# EAGLE board pcb - vcf et etage sortie v2 (EAGLE 9.5.1)
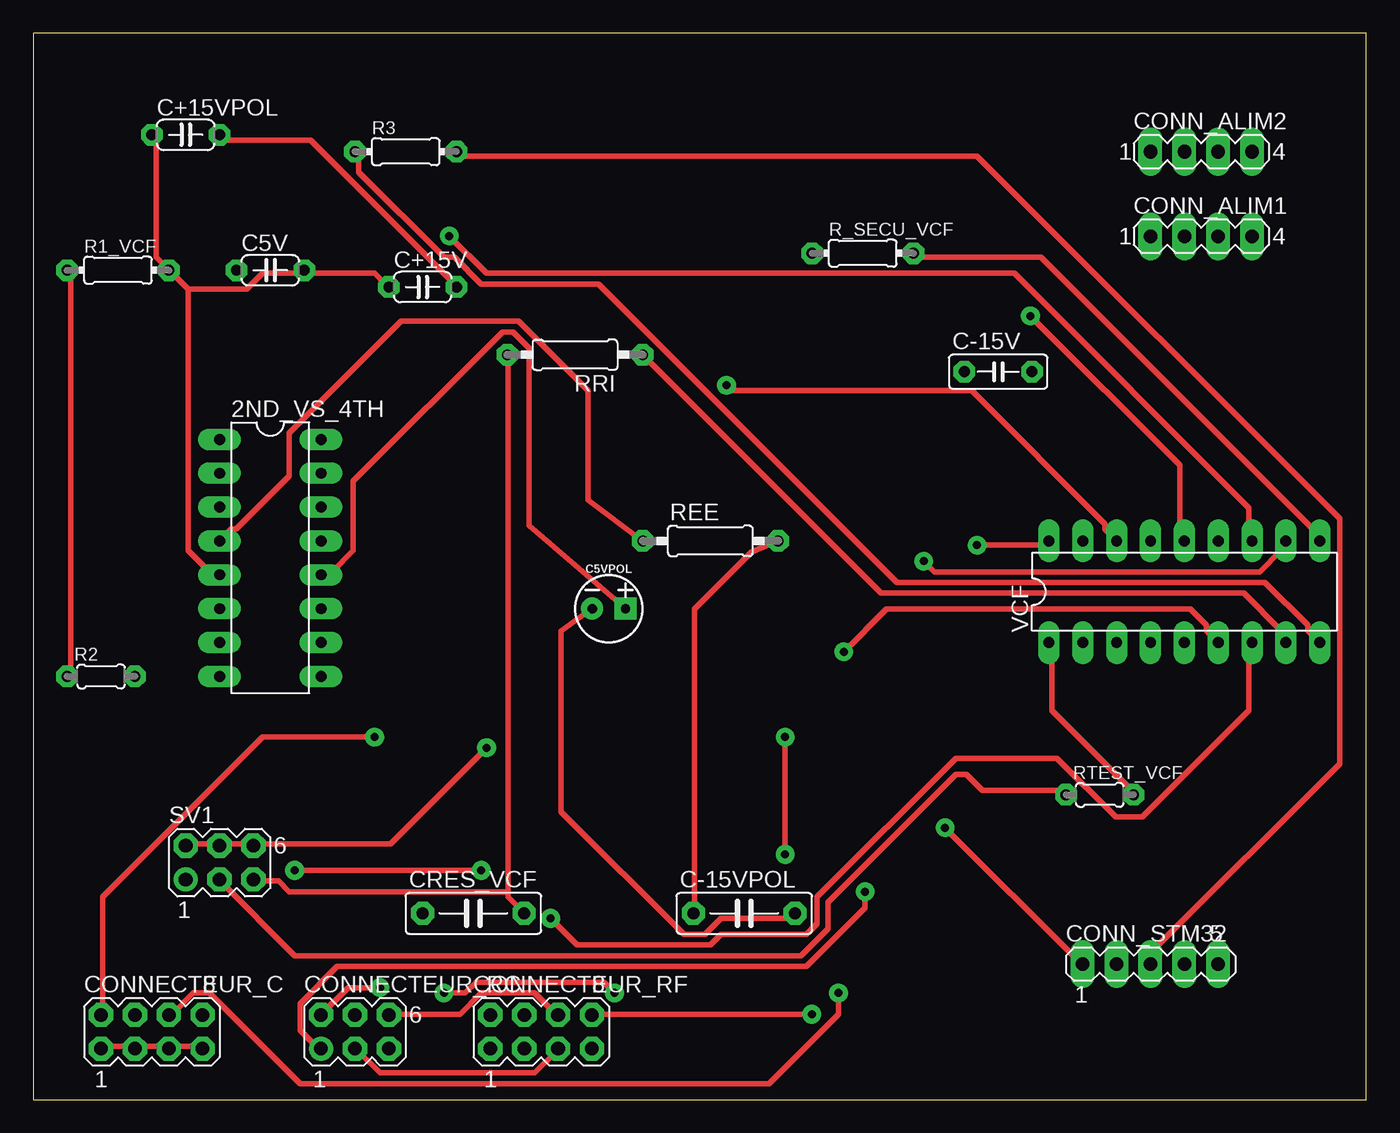
[diagram p0: board, top side]
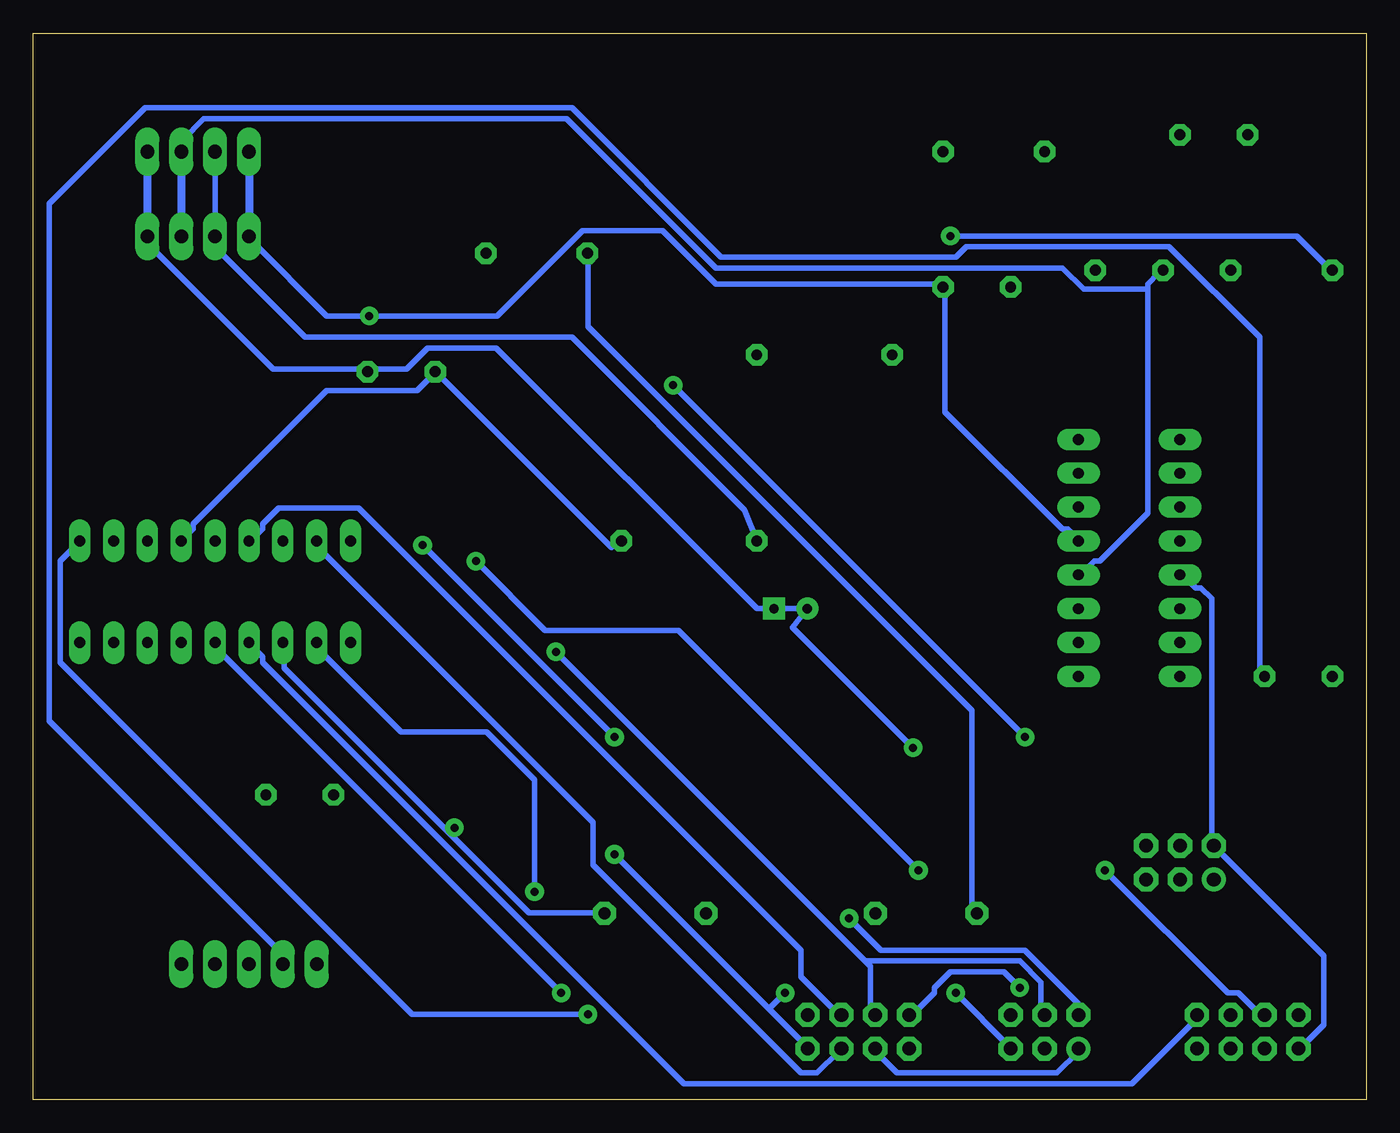
[diagram p1: board, bottom side, seen from below]

Size 100 x 80 mm. Coordinates in mm from the lower left corner, seen from the top.
Outline: 0,0 100,0 100,80 0,80 0,0
Copper layers (1*16): Top 0.035mm / dielectric 1.5mm / Bottom 0.035mm
Design rules "ENSEA_2019": minimum track width 0.4mm, minimum drill 0.6mm, track to track 0.4mm, track to pad 0.4mm, pad to pad 0.4mm, via to via 0.4mm, smd to smd 0.4mm, copper to edge 1mm, drill to drill 0.4mm, minimum pad ring 0.4mm, minimum via ring 0.4mm, stop-mask expansion 4mil, vias tented up to drill 0mil, thermal gap 0.4mm

## Footprints (pad centres in the part's own frame; a part is rotated, then mirrored left to right if it is on the bottom)
DIL16 = drill 0.813 long: 1 -8.89,-3.81; 2 -6.35,-3.81; 3 -3.81,-3.81; 4 -1.27,-3.81; 5 1.27,-3.81; 6 3.81,-3.81; 7 6.35,-3.81; 8 8.89,-3.81; 9 8.89,3.81; 10 6.35,3.81; 11 3.81,3.81; 12 1.27,3.81; 13 -1.27,3.81; 14 -3.81,3.81; 15 -6.35,3.81; 16 -8.89,3.81
C050-024X044 = drill 0.813 octagon: 1 -2.54,0; 2 2.54,0
CPOL-RADIAL-2.5MM-5MM-KIT = drill 0.7 pad 1.651 square: 1 1.25,0 | drill 0.7 pad 1.651: 2 -1.25,0
C050-025X075 = drill 0.813 octagon: 1 -2.54,0; 2 2.54,0
C075-032X103 = drill 0.914 octagon: 1 -3.81,0; 2 3.81,0
MA04-1 = drill 1.016 long: 1 -3.81,0; 2 -1.27,0; 3 1.27,0; 4 3.81,0
MA05-1 = drill 1.016 long: 1 -5.08,0; 2 -2.54,0; 3 0,0; 4 2.54,0; 5 5.08,0
MA04-2 = drill 1.016 octagon: 1 -3.81,-1.27; 2 -3.81,1.27; 3 -1.27,-1.27; 4 -1.27,1.27; 5 1.27,-1.27; 6 1.27,1.27; 7 3.81,-1.27; 8 3.81,1.27
MA03-2 = drill 1.016: 1 -2.54,-1.27 | drill 1.016 octagon: 2 -2.54,1.27; 3 0,-1.27; 4 0,1.27; 5 2.54,-1.27; 6 2.54,1.27
0204/7 = drill 0.813 octagon: 1 -3.81,0; 2 3.81,0
0204/5 = drill 0.813 octagon: 1 -2.54,0; 2 2.54,0
0207/10 = drill 0.813 octagon: 1 -5.08,0; 2 5.08,0
DIL18 = drill 0.813 long: 1 -10.16,-3.81; 2 -7.62,-3.81; 3 -5.08,-3.81; 4 -2.54,-3.81; 5 0,-3.81; 6 2.54,-3.81; 7 5.08,-3.81; 8 7.62,-3.81; 9 10.16,-3.81; 10 10.16,3.81; 11 7.62,3.81; 12 5.08,3.81; 13 2.54,3.81; 14 0,3.81; 15 -2.54,3.81; 16 -5.08,3.81; 17 -7.62,3.81; 18 -10.16,3.81

## Placement (x,y rotation side)
2ND_VS_4TH  ADG411N  [DIL16]  17.78,40.64 270 top
C5V  100n  [C050-024X044]  17.78,62.23 0 top
C5VPOL  10uF  [CPOL-RADIAL-2.5MM-5MM-KIT]  43.18,36.83 0 top
C+15V  100n  [C050-024X044]  29.21,60.96 0 top
C+15VPOL  1u  [C050-024X044]  11.43,72.39 0 top
C-15V  100n  [C050-025X075]  72.39,54.61 0 top
C-15VPOL  1u  [C075-032X103]  53.34,13.97 0 top
CONN_ALIM1  [MA04-1]  87.63,64.77 0 top
CONN_ALIM2  [MA04-1]  87.63,71.12 0 top
CONN_STM32  [MA05-1]  83.82,10.16 0 top
CONNECTEUR_C  [MA04-2]  8.89,5.08 0 top
CONNECTEUR_RC  [MA03-2]  24.13,5.08 0 top
CONNECTEUR_RF  [MA04-2]  38.1,5.08 0 top
CRES_VCF  1u  [C075-032X103]  33.02,13.97 0 top
R1_VCF  10k  [0204/7]  6.35,62.23 0 top
R2  100k  [0204/5]  5.08,31.75 0 top
R3  100k  [0204/7]  27.94,71.12 0 top
R_SECU_VCF  1k  [0204/7]  62.23,63.5 0 top
REE  1.5k  [0207/10]  50.8,41.91 0 top
RRI  51k  [0207/10]  40.64,55.88 180 top
RTEST_VCF  91k  [0204/5]  80.01,22.86 0 top
SV1  [MA03-2]  13.97,17.78 0 top
VCF  AS3320  [DIL18]  86.36,38.1 0 top

## Library data of the parts
2ND_VS_4TH = analog-devices; MF: ALTERA CORPORATION; MPN: ADG411BN; OC_FARNELL: 1424317; OC_NEWARK: 05F6198
C5V C+15V C+15VPOL C-15V C-15VPOL CRES_VCF = rcl; SPICEPREFIX: C
C5VPOL = SparkFun-Capacitors; PROD_ID: CAP-08440
CONN_ALIM1 CONN_ALIM2 CONN_STM32 CONNECTEUR_C CONNECTEUR_RC CONNECTEUR_RF SV1 = con-lstb; OC_FARNELL: unknown; OC_NEWARK: unknown
R1_VCF R2 R3 R_SECU_VCF REE RRI RTEST_VCF = rcl; SPICEPREFIX: R
VCF = analog-audio-chips

## Nets
5V: 2ND_VS_4TH.12 C5V.1 C5VPOL.1 CONN_ALIM1.3 CONN_ALIM2.3
+15V: 2ND_VS_4TH.13 C+15V.2 C+15VPOL.2 CONN_ALIM1.1 CONN_ALIM2.1 VCF.14
-15V: 2ND_VS_4TH.4 CONN_ALIM1.2 CONN_ALIM2.2 REE.1
AGND: 2ND_VS_4TH.5 C5V.2 C5VPOL.2 C+15V.1 C+15VPOL.1 C-15V.2 C-15VPOL.2 CONN_ALIM1.4 CONN_ALIM2.4 CONN_STM32.1 CONNECTEUR_C.1 CONNECTEUR_C.3 CONNECTEUR_C.5 CONNECTEUR_C.7 R1_VCF.2 SV1.2 SV1.4 SV1.6 VCF.3
CV_CUTOFF: CONN_STM32.2 R2.2
CV_RES: CONN_STM32.3 R3.2
I_IN: SV1.1
IN_2NDORDER: CONN_STM32.4
IN_4THORDER: CONN_STM32.5
N$1: CONNECTEUR_RF.1
N$2: CONNECTEUR_RC.2 CONNECTEUR_RF.2 VCF.7
N$3: CONNECTEUR_C.4 VCF.11
N$4: CONNECTEUR_C.2 VCF.16
N$5: CONNECTEUR_C.8 VCF.4
N$6: CONNECTEUR_C.6 VCF.5
N$7: CONNECTEUR_RC.1 CONNECTEUR_RF.3 VCF.2
N$8: CONNECTEUR_RC.4 CONNECTEUR_RF.4 VCF.6
N$9: CONNECTEUR_RC.3 CONNECTEUR_RF.5 VCF.17
N$10: CONNECTEUR_RC.6 CONNECTEUR_RF.6 VCF.15
N$11: CONNECTEUR_RC.5 CONNECTEUR_RF.7 VCF.18
N$37: R1_VCF.1 R2.1 VCF.12
N$58: CRES_VCF.1 R_SECU_VCF.1
N$69: CONNECTEUR_RF.8 R_SECU_VCF.2 VCF.10
N$86: RRI.1 VCF.8
N$87: R3.1 VCF.9
OUT: CRES_VCF.2 RRI.2 SV1.5
V_IN: RTEST_VCF.1 SV1.3
VCF_IN: RTEST_VCF.2 VCF.1
VM3320: C-15V.1 C-15VPOL.1 REE.2 VCF.13

## Tracks (layer width: path | path; a pad name or v marks a point on that pad's centre or on a via)
5V
  Top 0.4: C5VPOL.1 37.2,43.06 37.2,56.4 36,57.6 35.2,57.6 24,46.4 24,41.2 22.4,39.6 21.6,39.6 2ND_VS_4TH.12
  Bottom 0.4: 16.4,60.8 16.4,61.2 15.6,62 C5V.1 | 16.4,60.8 16.4,44 20,40.4 20.4,40.4 21.2,39.6 2ND_VS_4TH.12 | 16.4,60.8 21.2,60.8 22.8,62.4 48.8,62.4 60,73.6 87.2,73.6 88.8,72 88.8,71.2 CONN_ALIM2.3
  Bottom 0.61: CONN_ALIM2.3 CONN_ALIM1.3
+15V  (via drill 0.6)
  Top 0.4: v74.8,58.8 86,47.6 86,42 VCF.14 | C+15VPOL.2 14,72 20.8,72 31.6,61.2 C+15V.2
  Bottom 0.4: CONN_ALIM1.1 83.6,64.4 78,58.8 v74.8,58.8 65.2,58.8 58.8,65.2 52.8,65.2 48.8,61.2 32,61.2 C+15V.2 31.6,60.8 31.6,51.6 22.8,42.8 22.4,42.8 21.6,42 2ND_VS_4TH.13
  Bottom 0.61: CONN_ALIM2.1 CONN_ALIM1.1
-15V
  Top 0.4: 2ND_VS_4TH.4 14,42 14.8,42.8 15.2,42.8 19.2,46.8 19.2,50 27.6,58.4 36.4,58.4 41.6,53.2 41.6,44.97 REE.1
  Bottom 0.4: CONN_ALIM2.2 CONN_ALIM1.2 86,64.4 86,63.6 79.6,57.2 59.6,57.2 46.63,44.23 REE.1
AGND  (via drill 0.6)
  Top 0.4: C+15V.1 26.4,61.2 25.6,62 20.4,62 C5V.2 20,62 17.2,62 16,60.8 11.6,60.8 | C+15VPOL.1 9.2,72 9.2,63.2 10,62.4 R1_VCF.2 10.4,62 11.6,60.8 | CONNECTEUR_C.1 5.2,4 7.6,4 CONNECTEUR_C.3 8,4 10,4 CONNECTEUR_C.5 10.4,4 12.4,4 CONNECTEUR_C.7 | SV1.2 11.6,19.2 13.6,19.2 SV1.4 14,19.2 16.4,19.2 SV1.6 16.8,19.2 26.8,19.2 v34,26.4 | 11.6,60.8 11.6,41.2 13.6,39.2 2ND_VS_4TH.5 | C5VPOL.2 39.6,35.17 39.6,21.6 48.8,12.4 50.4,12.4 51.6,13.6 56.8,13.6 C-15VPOL.2 | v68.4,20.4 78.4,10.4 CONN_STM32.1
  Bottom 0.4: 2ND_VS_4TH.5 13.6,39.2 12.8,38.4 12.4,38.4 11.6,37.6 11.6,19.2 SV1.2 11.2,18.8 3.2,10.8 3.2,5.6 4.8,4 CONNECTEUR_C.1 | CONN_ALIM1.4 91.6,64.4 82,54.8 75.2,54.8 C-15V.2 74.8,54.8 72,54.8 70.4,56.4 65.27,56.4 45.7,36.83 C5VPOL.2 43.03,35.43 v34,26.4 | 68.8,20 62.8,14 57.2,14 C-15VPOL.2 | 68.8,20 81.2,32.4 81.2,34 VCF.3 | 68.8,20 v68.4,20.4
  Bottom 0.61: CONN_ALIM2.4 CONN_ALIM1.4
CV_CUTOFF
  Bottom 0.4: R2.2 8,32 8,57.2 14.8,64 30,64 30.8,63.2 48.4,63.2 59.6,74.4 91.6,74.4 98.8,67.2 98.8,28.4 81.6,11.2 81.6,10.4 CONN_STM32.2
CV_RES
  Top 0.4: R3.2 32,70.8 70.8,70.8 98,43.6 98,25.2 84,11.2 84,10.4 CONN_STM32.3
N$2  (via drill 0.6)
  Top 0.4: v38.8,13.6 40.8,11.6 50.8,11.6 51.6,12.4 58,12.4 58.8,13.2 58.8,15.2 69.2,25.6 76.8,25.6 81.2,21.2 83.2,21.2 91.2,29.2 91.2,34 VCF.7 | v26,8.4 23.6,8.4 21.6,6.4 CONNECTEUR_RC.2
  Bottom 0.4: v38.8,13.6 36.4,11.2 25.6,11.2 21.6,7.2 21.6,6.4 CONNECTEUR_RC.2 | v26,8.4 27.2,9.6 31.2,9.6 32.4,8.4 32.4,8 34,6.4 CONNECTEUR_RF.2
N$3  (via drill 0.6)
  Top 0.4: v66.8,40.4 67.6,39.6 92,39.6 93.6,41.2 93.6,41.6 VCF.11 | v19.6,17.2 v33.6,17.2
  Bottom 0.4: v66.8,40.4 61.6,35.2 51.6,35.2 v33.6,17.2 | v19.6,17.2 10.4,8 9.6,8 8,6.4 CONNECTEUR_C.4
N$4  (via drill 0.6)
  Top 0.4: v52,53.6 52.4,53.2 70.4,53.2 80.4,43.2 80.4,42.8 81.2,42 VCF.16 | v25.6,27.2 17.2,27.2 5.2,15.2 5.2,6.4 CONNECTEUR_C.2
  Bottom 0.4: v25.6,27.2 v52,53.6
N$5
  Bottom 0.4: VCF.4 83.6,34 82.8,33.2 82.8,32.8 51.2,1.2 17.6,1.2 12.8,6 CONNECTEUR_C.8
N$6  (via drill 0.6)
  Top 0.4: v60.4,8 60.4,6.4 55.2,1.2 20,1.2 13.2,8 12,8 10.4,6.4 CONNECTEUR_C.6
  Bottom 0.4: v60.4,8 86,33.6 86,34 VCF.5
N$7  (via drill 0.6)
  Top 0.4: v62.4,15.6 62.4,14.4 58,10 22.8,10 20,7.2 20,5.2 21.2,4 CONNECTEUR_RC.1
  Bottom 0.4: v62.4,15.6 62.4,24 66,27.6 72.4,27.6 78.4,33.6 78.4,34 VCF.2 | CONNECTEUR_RF.3 36.8,3.6 35.2,2 23.2,2 21.6,3.6 CONNECTEUR_RC.1
N$8  (via drill 0.6)
  Top 0.4: v60.8,33.6 64,36.8 86.8,36.8 88,35.6 88,35.2 88.8,34.4 VCF.6
  Bottom 0.4: 37.6,10.4 37.2,10 37.2,6.4 CONNECTEUR_RF.4 | 37.6,10.4 v60.8,33.6 | 37.6,10.4 26,10.4 24.4,8.8 24.4,6.4 CONNECTEUR_RC.4
N$9
  Top 0.4: CONNECTEUR_RC.3 24.4,3.6 26,2 37.6,2 39.2,3.6 CONNECTEUR_RF.5
  Bottom 0.4: VCF.17 78.4,41.6 78.4,41.2 58,20.8 58,17.6 42.4,2 41.2,2 39.6,3.6 CONNECTEUR_RF.5
N$10
  Top 0.4: CONNECTEUR_RC.6 26.8,6.4 32,6.4 33.6,8 37.6,8 39.2,6.4 CONNECTEUR_RF.6
  Bottom 0.4: VCF.15 83.6,42 82.8,42.8 82.8,43.2 81.6,44.4 75.6,44.4 42.4,11.2 42.4,9.2 39.6,6.4 CONNECTEUR_RF.6
N$11  (via drill 0.6)
  Top 0.4: v70.8,41.6 76,41.6 VCF.18 | v56.4,18.4 v56.4,27.2 | v30.8,8 32.4,8 33.2,8.8 42.8,8.8 v43.6,8
  Bottom 0.4: v56.4,27.2 v70.8,41.6 | 44.8,6.8 42,4 CONNECTEUR_RF.7 | 44.8,6.8 v56.4,18.4 | v30.8,8 26.8,4 CONNECTEUR_RC.5 | 44.8,6.8 v43.6,8
N$37  (via drill 0.6)
  Top 0.4: R2.1 2.8,32 2.8,62 R1_VCF.1 | v31.2,64.8 34,62 73.6,62 91.2,44.4 91.2,42 VCF.12
  Bottom 0.4: v31.2,64.8 5.2,64.8 2.8,62.4 R1_VCF.1
N$58
  Bottom 0.4: R_SECU_VCF.1 58.4,63.2 58.4,58 29.6,29.2 29.6,14 CRES_VCF.1
N$69  (via drill 0.6)
  Top 0.4: R_SECU_VCF.2 66.4,63.2 75.6,63.2 96.8,42 VCF.10 | v58.4,6.4 42,6.4 CONNECTEUR_RF.8
  Bottom 0.4: v58.4,6.4 71.6,6.4 98,32.8 98,40.4 96.8,41.6 VCF.10
N$86
  Top 0.4: RRI.1 63.6,38 90.8,38 93.6,35.2 93.6,34.4 VCF.8
N$87
  Top 0.4: VCF.9 96.4,34.4 95.6,35.2 95.6,35.6 92.4,38.8 64.8,38.8 42.4,61.2 33.6,61.2 31.6,63.2 30.8,63.2 24.4,69.6 24.4,70.8 R3.1
OUT
  Top 0.4: 35.6,15.6 35.6,15.2 CRES_VCF.2 | 35.6,15.6 35.6,55.6 RRI.2 | 35.6,15.6 19.2,15.6 18.4,16.4 16.8,16.4 SV1.5
V_IN
  Top 0.4: RTEST_VCF.1 77.2,23.2 71.2,23.2 70,24.4 69.2,24.4 59.6,14.8 59.6,12.8 57.6,10.8 19.6,10.8 14,16.4 SV1.3
VCF_IN
  Top 0.4: VCF.1 76.4,34 76.4,29.2 82.4,23.2 RTEST_VCF.2
VM3320
  Top 0.4: C-15VPOL.1 49.6,14 49.6,36.8 53.89,41.09 REE.2
  Bottom 0.4: REE.2 56.6,41.41 69.6,54.4 C-15V.1 70,54.4 71.2,53.2 78,53.2 88,43.2 88,42.8 88.8,42 VCF.13